# EAGLE board team back ECU (EAGLE 9.6.2)
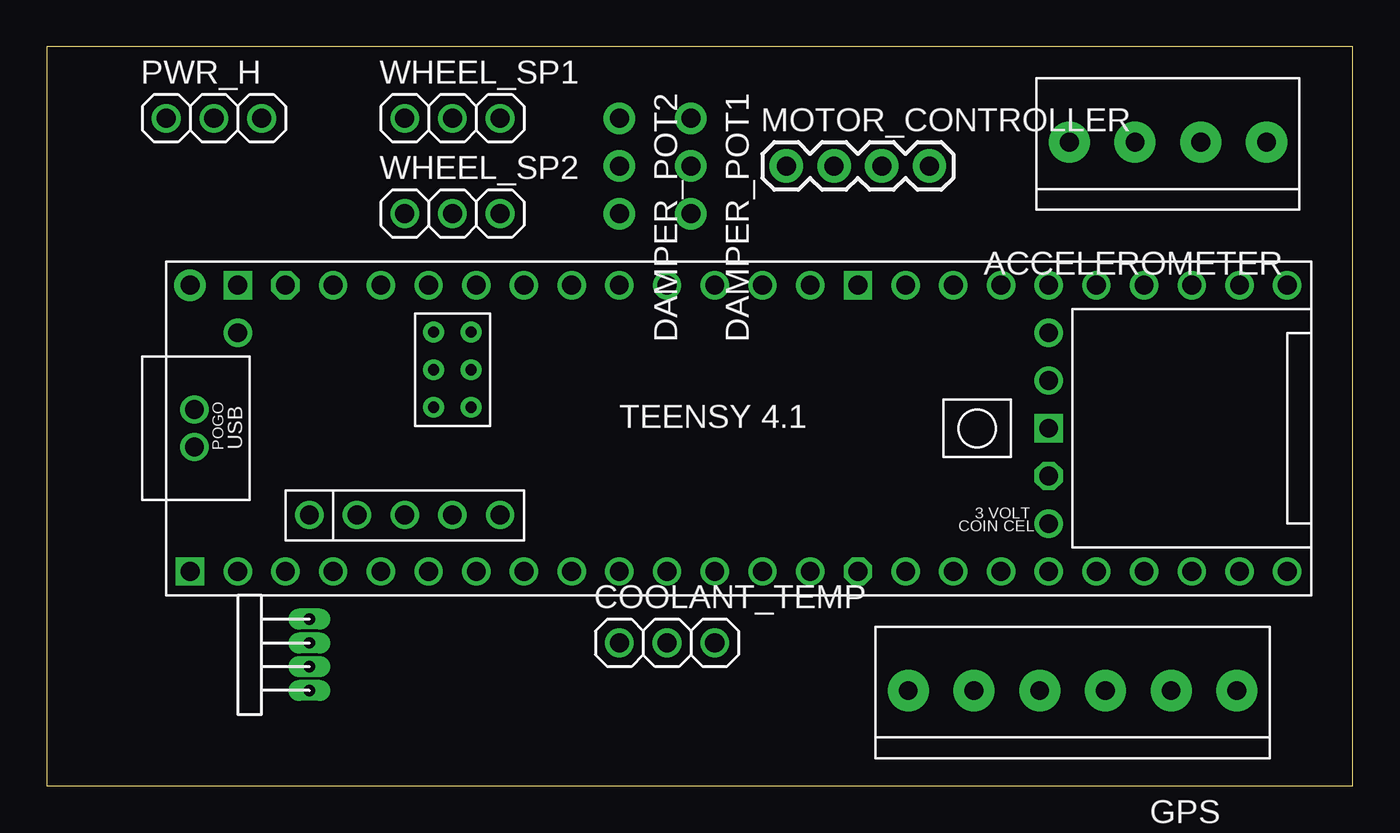
[diagram p0: board, top side]
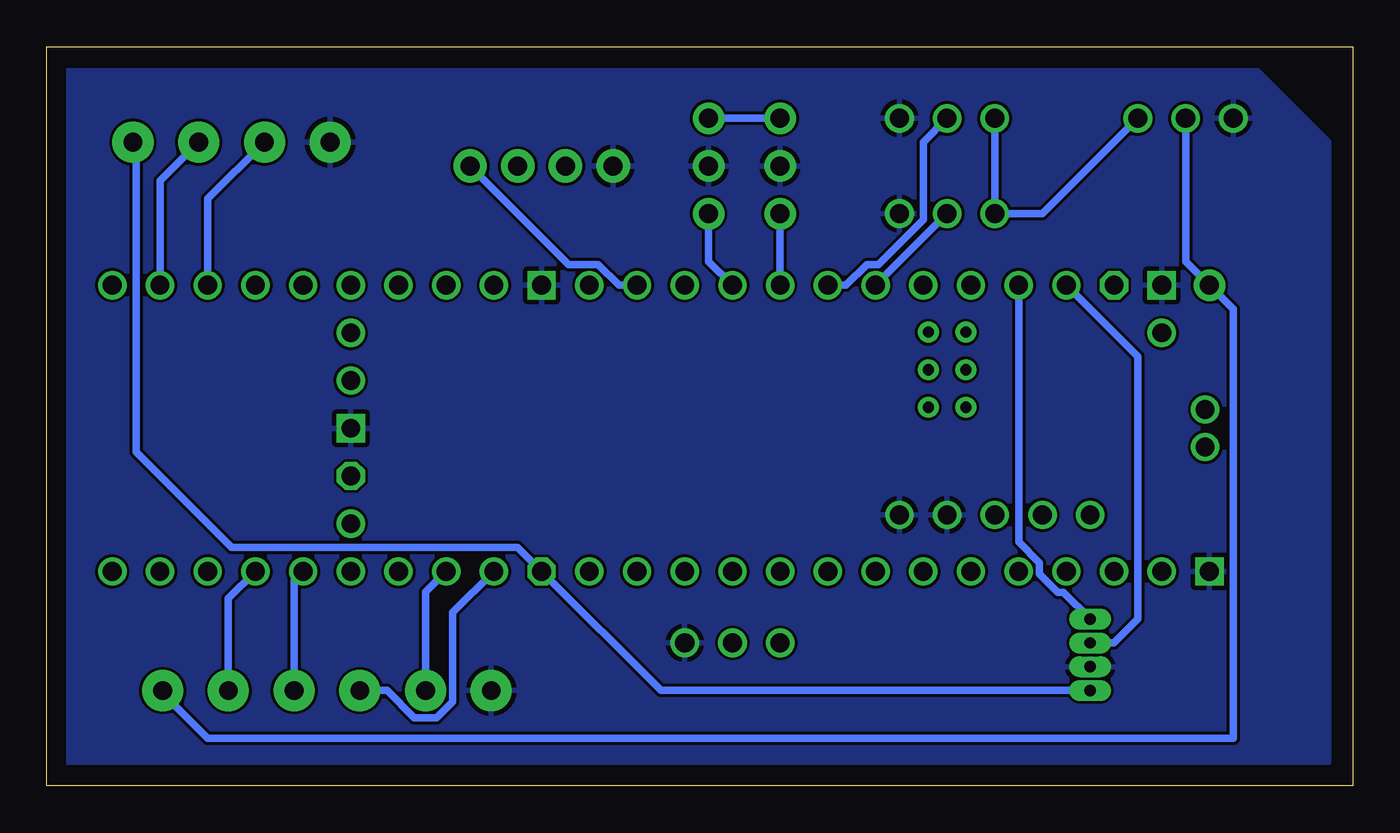
[diagram p1: board, bottom side, seen from below]

Size 69.52 x 39.36 mm. Coordinates in mm from the lower left corner, seen from the top.
Outline: 0,0 69.52,0 69.52,39.36 0,39.36 0,0
Copper layers (1*16): Top 0.035mm / dielectric 1.5mm / Bottom 0.035mm
Design rules "default": minimum track width 6mil, minimum drill 0.35mm, track to track 6mil, track to pad 6mil, pad to pad 6mil, via to via 6mil, smd to smd 6mil, copper to edge 40mil, drill to drill 6mil, minimum pad ring 10mil, minimum via ring 8mil, stop-mask expansion 4mil, vias tented up to drill 0mil, thermal gap 10mil

## Footprints (pad centres in the part's own frame; a part is rotated, then mirrored left to right if it is on the bottom)
1X04-3.5MM = drill 1 pad 2.184: 1 -5.25,0; 2 -1.75,0; 3 1.75,0; 4 5.25,0
CAN_TEN = drill 0.6 long: P$1 2.54,1.27; P$2 3.81,1.27; P$3 5.08,1.27; P$4 6.35,1.27
1X03 = drill 1.016: 1 -2.54,0; 2 0,0; 3 2.54,0
1X03-CLEANBIG = drill 1.016 pad 1.676: 1 -2.54,0; 2 0,0; 3 2.54,0
1X06-3.5MM = drill 1 pad 2.184: 1 -8.75,0; 2 -5.25,0; 3 -1.75,0; 4 1.75,0; 5 5.25,0; 6 8.75,0
1X04-BIG = drill 1.016 pad 1.778: 1 0,0; 2 2.54,0; 3 5.08,0; 4 7.62,0
TEENSY41 = drill 1: 0-RX1/CS1/CRX2 -27.94,-7.62; 1-TX1/MISO1/CTX2 -25.4,-7.62; 2-OUT2 -22.86,-7.62; 3-LRCLK2 -20.32,-7.62; 4-BCLK2 -17.78,-7.62; 5-IN2 -15.24,-7.62; 6-OUT1D -12.7,-7.62; 7-RX2/OUT1A -10.16,-7.62; 8-TX2/IN2 -7.62,-7.62; 9-OUT1C -5.08,-7.62; 10-CS\MQSR -2.54,-7.62; 11-MOSI/CTX1 0,-7.62; 12-MISO/MQSL 2.54,-7.62; 13-SCK/LED 2.54,7.62; 14-A0/TX3/SPDIF_OUT 0,7.62; 15-A1/RX3/SPDIF_IN -2.54,7.62; 16-A2/RX4/SCL1 -5.08,7.62; 17-A3/TX4/SDA1 -7.62,7.62; 18-A4/SDA0 -10.16,7.62; 19-A5/SCL0 -12.7,7.62; 20-A6/TX5/LRCLK1 -15.24,7.62; 21-A7/RX5/BCLK1 -17.78,7.62; 22-A8/CTX1 -20.32,7.62; 23-A9/CRX1/MCLK1 -22.86,7.62; 24-A10/TX6/SCL2 7.62,-7.62; 25-A11/RX6/SDA2 10.16,-7.62; 26-A12/MOSI1 12.7,-7.62; 27-A13/SCK1 15.24,-7.62; 28-RX7 17.78,-7.62; 29-TX7 20.32,-7.62; 30-CRX3 22.86,-7.62; 31-CTX3 25.4,-7.62; 32-OUT1B 27.94,-7.62; 33-MCLK2 27.94,7.62; 34-RX8 25.4,7.62; 35-TX8 22.86,7.62; 36-PWM 20.32,7.62; 37-PWM 17.78,7.62; 38-A14/CS/IN1 15.24,7.62; 39-A15/CS/OUT1A 12.7,7.62; 40-A16/CS1 10.16,7.62; 41-A17/MISO1 7.62,7.62; +5V -24.13,-4.62; D+ -30.25,-1; D- -30.25,1; DM -21.59,-4.62; DP -19.05,-4.62; GND4 -16.51,-4.62; GND5 -13.97,-4.62; ON/OFF 15.24,5.08; PROGRAM 15.24,2.54; VBAT 15.24,-5.08; VUSB -27.94,5.08 | drill 1 octagon: 3V3-1 5.08,-7.62; 3V3-2 15.24,-2.54; 3V3-3 -25.4,7.62 | drill 0.6: G -15.51,3.12; LED -17.51,3.12; R+ -17.51,5.12; R- -15.51,5.12; T+ -15.51,1.12; T- -17.51,1.12 | drill 1 square: GND1 -30.48,-7.62; GND2 15.24,0; GND3 5.08,7.62; GND6 -27.94,7.62 | drill 1 pad 1.676: VIN -30.48,7.62

## Placement (x,y rotation side)
ACCELEROMETER  1X4-3.5MM  [1X04-3.5MM]  59.69,34.29 0 top
CAN1_TEE  CAN_TEE  [CAN_TEN]  15.24,2.54 90 top
COOLANT_TEMP  [1X03]  33.02,7.62 0 top
DAMPER_POT1  [1X03-CLEANBIG]  34.29,33.02 270 top
DAMPER_POT2  [1X03-CLEANBIG]  30.48,33.02 270 top
GPS  [1X06-3.5MM]  54.61,5.08 0 top
MOTOR_CONTROLLER  1X4-BIG  [1X04-BIG]  39.37,33.02 0 top
PWR_H  [1X03]  8.89,35.56 0 top
U$1  TEENSY41  [TEENSY41]  38.1,19.05 0 top
WHEEL_SP1  [1X03]  21.59,35.56 0 top
WHEEL_SP2  [1X03]  21.59,30.48 0 top

## Library data of the parts
ACCELEROMETER = adafruit; AC: Accelerometor
CAN1_TEE = F-E library custom components
COOLANT_TEMP DAMPER_POT1 DAMPER_POT2 GPS MOTOR_CONTROLLER PWR_H WHEEL_SP1 WHEEL_SP2 = adafruit
U$1 = teensy

## Nets
3.3V: ACCELEROMETER.4 CAN1_TEE.P$1 U$1.3V3-1
5V: GPS.6 PWR_H.2 U$1.VIN
12V: PWR_H.3 WHEEL_SP1.1 WHEEL_SP2.1
A2: DAMPER_POT1.3 U$1.16-A2/RX4/SCL1
A3: DAMPER_POT2.3 U$1.17-A3/TX4/SDA1
A_MC: MOTOR_CONTROLLER.4 U$1.14-A0/TX3/SPDIF_OUT
BR_VCC: DAMPER_POT1.1 DAMPER_POT2.1
GND: ACCELEROMETER.1 CAN1_TEE.P$2 COOLANT_TEMP.3 DAMPER_POT1.2 DAMPER_POT2.2 GPS.1 MOTOR_CONTROLLER.1 PWR_H.1 U$1.GND1 U$1.GND2 U$1.GND3 U$1.GND4 U$1.GND5 U$1.GND6 WHEEL_SP1.3 WHEEL_SP2.3
N$2: CAN1_TEE.P$3 U$1.23-A9/CRX1/MCLK1
N$3: CAN1_TEE.P$4 U$1.22-A8/CTX1
RX: ACCELEROMETER.2 U$1.35-TX8
RX_2: GPS.5 U$1.29-TX7
SCL: GPS.3 U$1.24-A10/TX6/SCL2
SDA: GPS.2 U$1.25-A11/RX6/SDA2
TX: ACCELEROMETER.3 U$1.34-RX8
TX_2: GPS.4 U$1.28-RX7
WH_SP1_D: U$1.18-A4/SDA0 WHEEL_SP1.2
WH_SP2_D: U$1.19-A5/SCL0 WHEEL_SP2.2

## Tracks (layer width: path | path; a pad name or v marks a point on that pad's centre or on a via)
3.3V
  Bottom 0.406: CAN1_TEE.P$1 36.83,5.08 U$1.3V3-1 44.45,12.7 59.69,12.7 64.77,17.78 64.77,34.12 ACCELEROMETER.4
5V
  Bottom 0.406: PWR_H.2 8.89,27.94 U$1.VIN 6.35,25.4 6.35,2.54 60.96,2.54 63.36,4.94 GPS.6
12V
  Bottom 0.406: WHEEL_SP1.1 WHEEL_SP2.1 16.51,30.48 PWR_H.3
A2
  Bottom 0.406: DAMPER_POT1.3 34.29,27.94 U$1.16-A2/RX4/SCL1
A3
  Bottom 0.406: DAMPER_POT2.3 U$1.17-A3/TX4/SDA1
A_MC
  Bottom 0.406: MOTOR_CONTROLLER.4 41.75,27.78 40.18,27.78 39.07,26.67 U$1.14-A0/TX3/SPDIF_OUT
BR_VCC
  Bottom 0.406: DAMPER_POT1.1 DAMPER_POT2.1
GND
  pour Bottom: 1.27,1.27 68.58,1.27 68.58,38.1 5.08,38.1 1.27,34.29
N$2
  Bottom 0.406: CAN1_TEE.P$3 12.7,7.62 11.43,8.89 11.43,22.86 U$1.23-A9/CRX1/MCLK1
N$3
  Bottom 0.406: CAN1_TEE.P$4 15.4,10.32 15.7,10.32 16.67,11.29 16.67,11.89 17.78,13 U$1.22-A8/CTX1
RX
  Bottom 0.406: ACCELEROMETER.2 60.96,31.27 U$1.35-TX8
RX_2
  Bottom 0.406: GPS.5 59.86,9.99 U$1.29-TX7
SCL
  Bottom 0.406: U$1.24-A10/TX6/SCL2 47.91,9.24 47.91,4.48 48.76,3.63 49.96,3.63 51.41,5.08 GPS.3
SDA
  Bottom 0.406: GPS.2 49.36,10.33 U$1.25-A11/RX6/SDA2
TX
  Bottom 0.406: ACCELEROMETER.3 63.5,32.23 U$1.34-RX8
TX_2
  Bottom 0.406: GPS.4 56.36,10.95 U$1.28-RX7
WH_SP1_D
  Bottom 0.406: WHEEL_SP1.2 22.86,34.29 22.86,30.17 25.25,27.78 25.86,27.78 26.97,26.67 U$1.18-A4/SDA0
WH_SP2_D
  Bottom 0.406: WHEEL_SP2.2 U$1.19-A5/SCL0